# EAGLE board eurorack-bela (EAGLE 6.6.0)
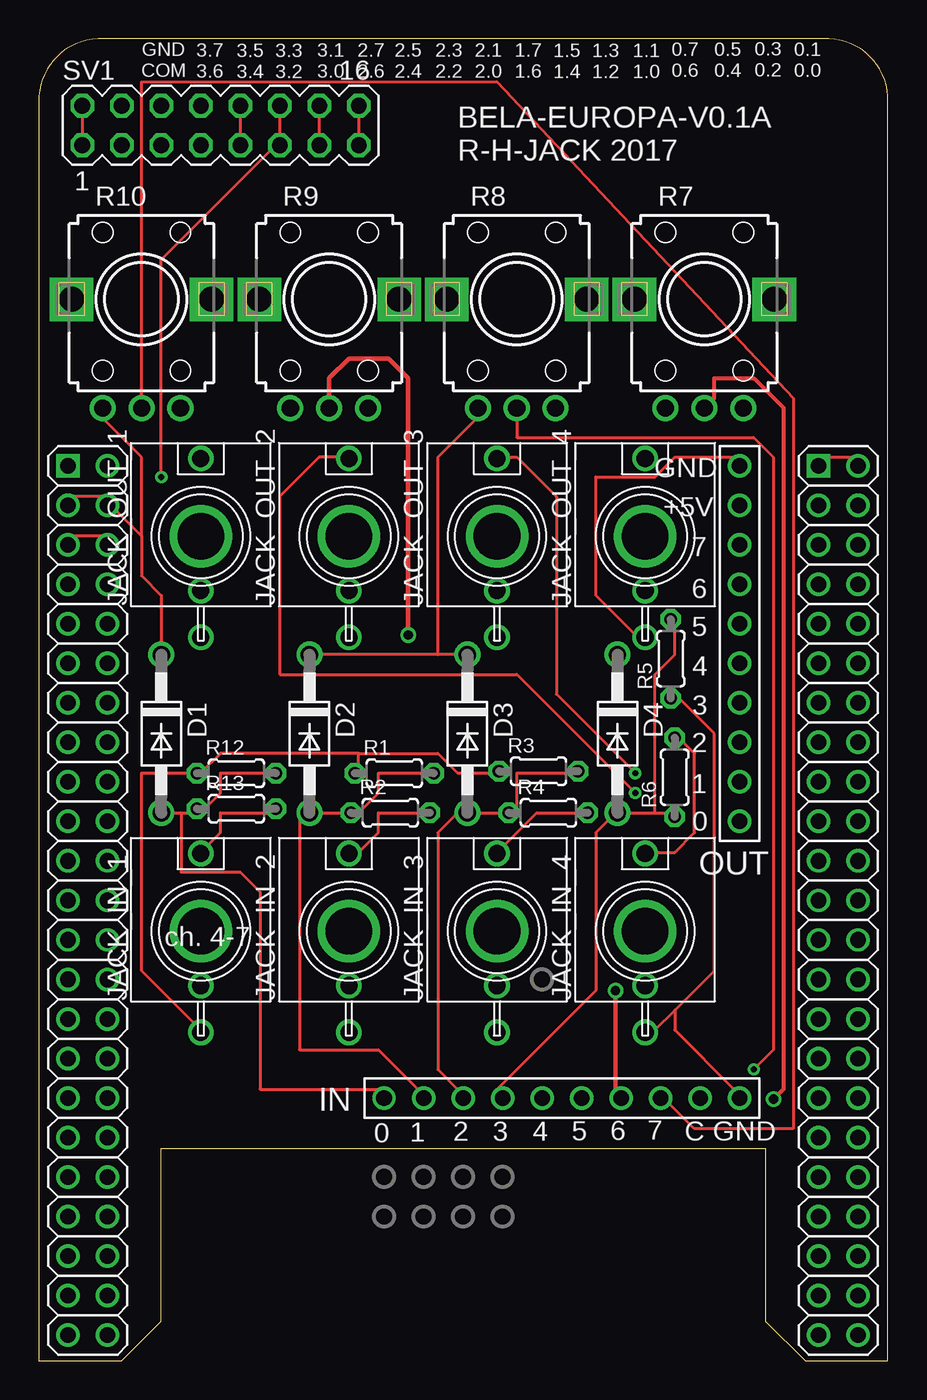
[diagram p0: board, top side]
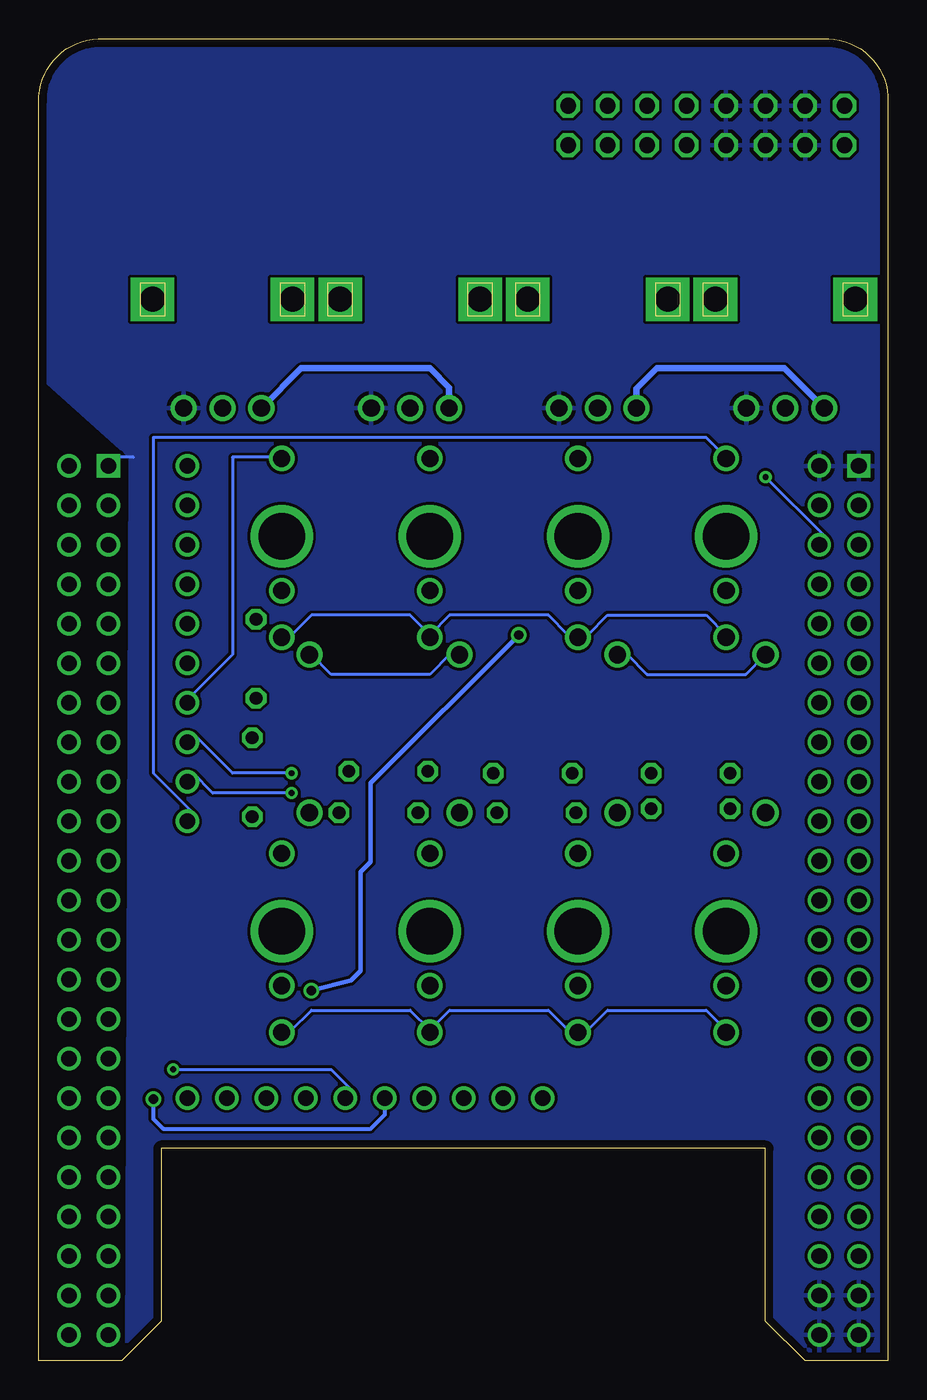
[diagram p1: board, bottom side, seen from below]

Size 54.61 x 84.99 mm. Coordinates in mm from the lower left corner, seen from the top.
Outline: 54.61,0 54.61,80.95 arc90 50.8,84.99 3.81,84.99 arc90 0,80.95 0,0 5.33,0 7.87,2.54 7.87,13.64 46.74,13.64 46.74,2.54 49.28,0 54.61,0
Copper layers (1*16): Top 0.035mm / dielectric 1.5mm / Bottom 0.035mm
Design rules "default *": minimum track width 7mil, minimum drill 15mil, track to track 7mil, track to pad 7mil, pad to pad 7mil, via to via 7mil, smd to smd 0mil, copper to edge 20mil, drill to drill 8mil, minimum pad ring 10mil, minimum via ring 8mil, stop-mask expansion 4mil, vias tented up to drill 20mil, thermal gap 10mil

## Footprints (pad centres in the part's own frame; a part is rotated, then mirrored left to right if it is on the bottom)
DO41-10 = drill 1.118: A 5.08,0; C -5.08,0
JACK-3.5 = drill 1.1: P$1 0,5; P$2 0,-3.5; P$3 0,-6.5 | drill 3: P$4 0,0
0204/5 = drill 0.813 octagon: 1 -2.54,0; 2 2.54,0
EVUF = drill 1.1 pad 1.676: 1 -2.5,-7; 2 0,-7; 3 2.5,-7 | drill 1.6 pad 2.8 square: M1 4.5,0; M2 -4.5,0
MA08-2 = drill 1.016 octagon: 1 -8.89,-1.27; 2 -8.89,1.27; 3 -6.35,-1.27; 4 -6.35,1.27; 5 -3.81,-1.27; 6 -3.81,1.27; 7 -1.27,-1.27; 8 -1.27,1.27; 9 1.27,-1.27; 10 1.27,1.27; 11 3.81,-1.27; 12 3.81,1.27; 13 6.35,-1.27; 14 6.35,1.27; 15 8.89,-1.27; 16 8.89,1.27
BELA_CAPELET_NO_OUTLINE = drill 1 square: 1 -20.32,-31.75; 47 27.94,-31.75 | drill 1: 2 -22.86,-31.75; 3 -20.32,-29.21; 4 -22.86,-29.21; 5 -20.32,-26.67; 6 -22.86,-26.67; 7 -20.32,-24.13; 8 -22.86,-24.13; 9 -20.32,-21.59; 10 -22.86,-21.59; 11 -20.32,-19.05; 12 -22.86,-19.05; 13 -20.32,-16.51; 14 -22.86,-16.51; 15 -20.32,-13.97; 16 -22.86,-13.97; 17 -20.32,-11.43; 18 -22.86,-11.43; 19 -20.32,-8.89; 20 -22.86,-8.89; 21 -20.32,-6.35; 22 -22.86,-6.35; 23 -20.32,-3.81; 24 -22.86,-3.81; 25 -20.32,-1.27; 26 -22.86,-1.27; 27 -20.32,1.27; 28 -22.86,1.27; 29 -20.32,3.81; 30 -22.86,3.81; 31 -20.32,6.35; 32 -22.86,6.35; 33 -20.32,8.89; 34 -22.86,8.89; 35 -20.32,11.43; 36 -22.86,11.43; 37 -20.32,13.97; 38 -22.86,13.97; 39 -20.32,16.51; 40 -22.86,16.51; 41 -20.32,19.05; 42 -22.86,19.05; 43 -20.32,21.59; 44 -22.86,21.59; 45 -20.32,24.13; 46 -22.86,24.13; 48 25.4,-31.75; 49 27.94,-29.21; 50 25.4,-29.21; 51 27.94,-26.67; 52 25.4,-26.67; 53 27.94,-24.13; 54 25.4,-24.13; 55 27.94,-21.59; 56 25.4,-21.59; 57 27.94,-19.05; 58 25.4,-19.05; 59 27.94,-16.51; 60 25.4,-16.51; 61 27.94,-13.97; 62 25.4,-13.97; 63 27.94,-11.43; 64 25.4,-11.43; 65 27.94,-8.89; 66 25.4,-8.89; 67 27.94,-6.35; 68 25.4,-6.35; 69 27.94,-3.81; 70 25.4,-3.81; 71 27.94,-1.27; 72 25.4,-1.27; 73 27.94,1.27; 74 25.4,1.27; 75 27.94,3.81; 76 25.4,3.81; 77 27.94,6.35; 78 25.4,6.35; 79 27.94,8.89; 80 25.4,8.89; 81 27.94,11.43; 82 25.4,11.43; 83 27.94,13.97; 84 25.4,13.97; 85 27.94,16.51; 86 25.4,16.51; 87 27.94,19.05; 88 25.4,19.05; 89 27.94,21.59; 90 25.4,21.59; 91 27.94,24.13; 92 25.4,24.13; IN_PIN1 7.62,8.89; IN_PIN2 5.08,8.89; IN_PIN3 2.54,8.89; IN_PIN4 0,8.89; IN_PIN5 -2.54,8.89; IN_PIN6 -5.08,8.89; IN_PIN7 -7.62,8.89; IN_PIN8 -10.16,8.89; IN_PIN9 -12.7,8.89; IN_PIN10 -15.24,8.89; OUT_PIN1 -15.24,-8.89; OUT_PIN2 -15.24,-11.43; OUT_PIN3 -15.24,-13.97; OUT_PIN4 -15.24,-16.51; OUT_PIN5 -15.24,-19.05; OUT_PIN6 -15.24,-21.59; OUT_PIN7 -15.24,-24.13; OUT_PIN8 -15.24,-26.67; OUT_PIN9 -15.24,-29.21; OUT_PIN10 -15.24,-31.75

## Placement (x,y rotation side)
D1  1N4004  [DO41-10]  7.87,40.31 270 top
D2  1N4004  [DO41-10]  17.4,40.31 270 top
D3  1N4004  [DO41-10]  27.56,40.31 270 top
D4  1N4004  [DO41-10]  37.21,40.31 270 top
JACK_IN_1  WQP_PJ301M-12_JACKWQP_PJ301M-12_JACK  [JACK-3.5]  10.41,27.61 0 top
JACK_IN_2  WQP_PJ301M-12_JACKWQP_PJ301M-12_JACK  [JACK-3.5]  19.94,27.61 0 top
JACK_IN_3  WQP_PJ301M-12_JACKWQP_PJ301M-12_JACK  [JACK-3.5]  29.46,27.61 0 top
JACK_IN_4  WQP_PJ301M-12_JACKWQP_PJ301M-12_JACK  [JACK-3.5]  38.99,27.61 0 top
JACK_OUT_1  WQP_PJ301M-12_JACKWQP_PJ301M-12_JACK  [JACK-3.5]  10.41,53.01 0 top
JACK_OUT_2  WQP_PJ301M-12_JACKWQP_PJ301M-12_JACK  [JACK-3.5]  19.94,53.01 0 top
JACK_OUT_3  WQP_PJ301M-12_JACKWQP_PJ301M-12_JACK  [JACK-3.5]  29.46,53.01 0 top
JACK_OUT_4  WQP_PJ301M-12_JACKWQP_PJ301M-12_JACK  [JACK-3.5]  38.99,53.01 0 top
R1  1K  [0204/5]  22.86,37.77 0 top
R2  1K  [0204/5]  22.61,35.23 0 top
R3  1K  [0204/5]  32.13,37.9 0 top
R4  1K  [0204/5]  32.77,35.23 0 top
R5  1K  [0204/5]  40.64,45.14 90 top
R6  1K  [0204/5]  40.89,37.52 90 top
R7  EVUF2A  [EVUF]  42.8,68.25 0 top
R8  EVUF2A  [EVUF]  30.73,68.25 0 top
R9  EVUF2A  [EVUF]  18.67,68.25 0 top
R10  EVUF2A  [EVUF]  6.6,68.25 0 top
R12  1K  [0204/5]  12.7,37.77 0 top
R13  1K  [0204/5]  12.7,35.48 0 top
SV1  [MA08-2]  11.68,79.43 0 top
U$1  BELA_CAPELET_NO_OUT  [BELA_CAPELET_NO_OUTLINE]  29.82,25.78 180 top

## Library data of the parts
D1-D4 = diode
JACK_IN_1-JACK_IN_4 JACK_OUT_1-JACK_OUT_4 = thonkiconn_eagle_v5
R1-R6 R12 R13 = resistor
R7-R10 = pot
SV1 = con-lstb; OC_FARNELL: unknown; OC_NEWARK: unknown
U$1 = custom

## Nets
1: JACK_IN_1.P$1 R13.2
2: JACK_IN_2.P$1 R2.2
3: JACK_IN_3.P$1 R4.2
3V3: D1.C D2.C D3.C D4.C R7.1 R8.1 R9.1 R10.1 U$1.49 U$1.50
4: JACK_IN_4.P$1 R6.2
+5V: SV1.11 SV1.12 U$1.51 U$1.52
+12V: SV1.9 SV1.10
-12V: SV1.1 SV1.2
AIN0: U$1.85
CV: SV1.13 SV1.14
GATE: SV1.15 SV1.16
GND: R7.3 R8.3 R9.3 R10.3 SV1.3 SV1.4 SV1.5 SV1.6 SV1.7 SV1.8 U$1.1 U$1.2 U$1.47 U$1.48 U$1.89 U$1.90 U$1.91 U$1.92
IN0: D1.A R12.2 R13.1 U$1.IN_PIN1
IN1: D2.A R1.2 R2.1 U$1.IN_PIN2
IN2: D3.A R3.2 R4.1 U$1.IN_PIN3
IN3: D4.A R5.2 R6.1 U$1.IN_PIN4
IN4: R7.2 U$1.IN_PIN5
IN5: R8.2 U$1.IN_PIN6
IN6: R9.2 U$1.IN_PIN7
IN7: R10.2 U$1.IN_PIN8
IN_COM: U$1.IN_PIN9
IN_GND: JACK_IN_1.P$3 JACK_IN_2.P$3 JACK_IN_3.P$3 JACK_IN_4.P$3 R1.1 R3.1 R5.1 R12.1 U$1.IN_PIN10
MUX1A: U$1.45
MUX1B: U$1.46
MUX1C: U$1.43
MUX2A: U$1.44
MUX2B: U$1.41
MUX2C: U$1.42
OUT1: JACK_OUT_1.P$1 U$1.OUT_PIN1
OUT2: JACK_OUT_2.P$1 U$1.OUT_PIN2
OUT3: JACK_OUT_3.P$1 U$1.OUT_PIN3
OUT4: JACK_OUT_4.P$1 U$1.OUT_PIN4
OUT5: U$1.OUT_PIN5
OUT6: U$1.OUT_PIN6
OUT7: U$1.OUT_PIN7
OUT8: U$1.OUT_PIN8
OUT_GND: JACK_OUT_1.P$3 JACK_OUT_2.P$3 JACK_OUT_3.P$3 JACK_OUT_4.P$3 U$1.OUT_PIN10
SYS_5V: U$1.53

## Tracks (layer width: path | path; a pad name or v marks a point on that pad's centre or on a via)
1
  Top 0.178: R13.2 15.49,35.23 11.68,35.23 11.68,33.96 10.41,32.69 JACK_IN_1.P$1
2
  Top 0.178: 25.65,35.23 R2.2 21.84,35.23 21.84,33.96 20.57,32.69 JACK_IN_2.P$1
3
  Top 0.178: 35.81,35.23 R4.2 32,35.23 29.46,32.69 JACK_IN_3.P$1
3V3
  Top 0.178: 4.06,55.55 1.52,55.55 U$1.49 | D1.C 7.87,49.2 6.6,50.47 6.6,53.01 | 4.06,55.55 6.6,53.01 | 4.06,55.55 U$1.50 | 6.6,53.01 6.6,58.09 4.06,60.63 R10.1 | D3.C 25.65,45.39 | 25.65,45.39 D2.C | 25.65,45.39 25.65,58.09 28.19,60.63 R8.1
  Bottom 0.178: D4.C 37.08,45.39 35.81,44.12 29.46,44.12 28.19,45.39 D3.C | D1.C 9.14,44.12 15.49,44.12 16.76,45.39 D2.C
  Bottom 0.406: R9.1 16.17,62.5 14.86,63.8 6.66,63.8 R10.1 | R8.1 28.23,62.58 29.46,63.8 37.74,63.8 R7.1
4
  Top 0.178: R6.2 40.89,40.31 42.16,39.04 42.16,33.96 40.89,32.69 39.62,32.69 JACK_IN_4.P$1
+5V  (via drill 0.38)
  Top 0.178: 15.49,78.41 SV1.12 15.49,80.95 | U$1.51 1.52,53.01 4.06,53.01 U$1.52 | 15.49,78.41 7.87,70.79 v7.87,56.82 | 15.49,78.41 SV1.11
  Bottom 0.178: 15.49,78.41 SV1.11 | v7.87,56.82 4.06,53.01 U$1.52
+12V
  Top 0.178: SV1.10 SV1.9
-12V
  Top 0.178: SV1.2 SV1.1
CV
  Top 0.178: SV1.14 SV1.13
GATE
  Top 0.178: SV1.16 SV1.15
GND
  Top 0.178: U$1.2 52.32,58.09 49.78,58.09 U$1.1
  Bottom 0.178: 48.51,58.09 49.78,58.09 U$1.1
  pour Bottom: 54.61,84.76 0.06,84.76 0.06,-0.1 48.92,0.1 48.72,58.14 54.61,63.42
IN0
  Top 0.178: D1.A 9.14,35.23 | 9.14,35.23 10.41,35.23 | 10.41,35.23 11.68,36.5 11.68,37.77 R12.2 15.49,37.77 | 10.41,35.23 R13.1 | 9.14,35.23 9.14,31.42 12.95,31.42 14.22,30.15 14.22,17.45 21.84,17.45 U$1.IN_PIN1
IN1
  Top 0.178: 25.65,37.77 R1.2 21.84,37.77 21.84,36.5 20.57,35.23 R2.1 D2.A 16.76,35.23 16.76,19.99 21.84,19.99 24.38,17.45 U$1.IN_PIN2
IN2
  Top 0.178: U$1.IN_PIN3 26.92,17.45 25.65,18.72 25.65,33.96 26.92,35.23 D3.A R4.1 30.73,35.23 30.73,37.77 34.54,37.77 R3.2
IN3
  Top 0.178: 39.62,35.23 D4.A 37.08,35.23 35.81,33.96 35.81,23.8 29.46,17.45 U$1.IN_PIN4 | 39.62,35.23 40.89,35.23 R6.1 | 39.62,35.23 39.62,44.12 40.89,45.39 40.89,47.93 R5.2
IN4  (via drill 0.6)
  Top 0.254: R7.2 43.43,61.88 43.43,63.17 45.97,63.17 47.88,61.27 47.88,17.45 v47.24,16.82
  Bottom 0.254: v47.24,16.82 47.24,15.54 46.61,14.91 33.27,14.91 32.36,15.82 U$1.IN_PIN5
IN5  (via drill 0.38)
  Top 0.178: v45.97,18.72 47.24,19.99 47.24,58.09 45.97,59.36 30.73,59.36 R8.2
  Bottom 0.178: v45.97,18.72 35.81,18.72 34.54,17.45 U$1.IN_PIN6
IN6  (via drill 0.6)
  Top 0.305: R9.2 18.67,63.17 19.94,64.44 22.48,64.44 23.75,63.17 v23.75,46.66 | v37.08,23.8 37.08,17.45 37.44,17.09 U$1.IN_PIN7
  Bottom 0.305: v23.75,46.66 33.27,37.13 33.27,32.06 33.91,31.42 33.91,25.07 34.54,24.43 v37.08,23.8
IN7
  Top 0.178: R10.2 6.6,82.22 29.46,82.22 48.51,61.9 48.51,14.91 42.16,14.91 39.62,17.45 U$1.IN_PIN8
IN_GND
  Top 0.178: 20.57,39.04 11.68,39.04 10.41,37.77 R12.1 6.6,37.77 6.6,25.07 10.41,21.26 JACK_IN_1.P$3 | 20.57,39.04 20.57,37.77 R1.1 | 40.89,22.53 39.62,21.26 JACK_IN_4.P$3 | 40.89,22.53 43.43,25.07 43.43,40.31 40.89,42.85 R5.1 | 40.89,22.53 40.89,21.26 44.7,17.45 U$1.IN_PIN10 | 20.57,39.04 25.65,39.04 26.92,37.77 29.46,37.77 R3.1
  Bottom 0.178: JACK_IN_1.P$3 10.41,21.26 11.68,22.53 18.03,22.53 19.3,21.26 JACK_IN_2.P$3 20.57,21.26 21.84,22.53 28.19,22.53 29.46,21.26 | 29.46,21.26 30.73,22.53 37.08,22.53 38.35,21.26 JACK_IN_4.P$3 | 29.46,21.26 JACK_IN_3.P$3
OUT1
  Bottom 0.178: JACK_OUT_1.P$1 10.41,58.09 11.68,59.36 47.24,59.36 47.24,37.77 44.7,35.23 U$1.OUT_PIN1
OUT2  (via drill 0.38)
  Top 0.178: v38.35,36.5 30.73,44.12 15.49,44.12 15.49,55.55 18.03,58.09 19.3,58.09 JACK_OUT_2.P$1
  Bottom 0.178: v38.35,36.5 43.43,36.5 44.7,37.77 U$1.OUT_PIN2
OUT3  (via drill 0.38)
  Top 0.178: v38.35,37.77 33.27,42.85 33.27,55.55 30.73,58.09 29.46,58.09 JACK_OUT_3.P$1
  Bottom 0.178: v38.35,37.77 42.16,37.77 44.7,40.31 U$1.OUT_PIN3
OUT4
  Bottom 0.178: U$1.OUT_PIN4 44.7,42.85 42.16,45.39 42.16,58.09 39.62,58.09 JACK_OUT_4.P$1
OUT_GND
  Top 0.178: U$1.OUT_PIN10 44.7,58.09 40.89,58.09 39.62,56.82 35.81,56.82 35.81,49.2 38.35,46.66 JACK_OUT_4.P$3
  Bottom 0.178: JACK_OUT_1.P$3 10.41,46.66 11.68,47.93 18.03,47.93 19.3,46.66 JACK_OUT_2.P$3 20.57,46.66 21.84,47.93 28.19,47.93 29.46,46.66 | 29.46,46.66 30.73,47.93 37.08,47.93 38.35,46.66 JACK_OUT_4.P$3 | 29.46,46.66 JACK_OUT_3.P$3

## Text on the board
tPlace: GND / COM | 3.7 / 3.6 | 3.1 / 3.0 | 2.7 / 2.6 | 2.5 / 2.4 | 2.3 / 2.2 | 2.1 / 2.0 | 1.7 / 1.6 | 0.7 / 0.6 | 0.5 / 0.4 | 0.3 / 0.2 | 0.1 / 0.0 | 3.5 / 3.4 | 3.3 / 3.2 | 1.5 / 1.4 | 1.3 / 1.2 | 1.1 / 1.0 | BELA-EUROPA-V0.1A / R-H-JACK 2017 | GND | +5V | 7 | 6 | 5 | 4 | 3 | 2 | 1 | 0 | OUT | ch. 4-7 | IN | 0 | 1 | 2 | 3 | 4 | 5 | 6 | 7 | C | GND